# Altium PCB WX0.012.615PCB-4.2.PcbDoc (part 1 of 2)
Units mil, origin at the board's own origin, x right, y up, seen from the top; angles counter-clockwise.
Board outline 3994.73 x 11120.28 mil, 2 copper layers (Top Layer, Bottom Layer), stack 62.249 mil thick; 155 components, 122 nets, 589 pads, 368 vias.
Unrouted connection lines stored in the file: 340.
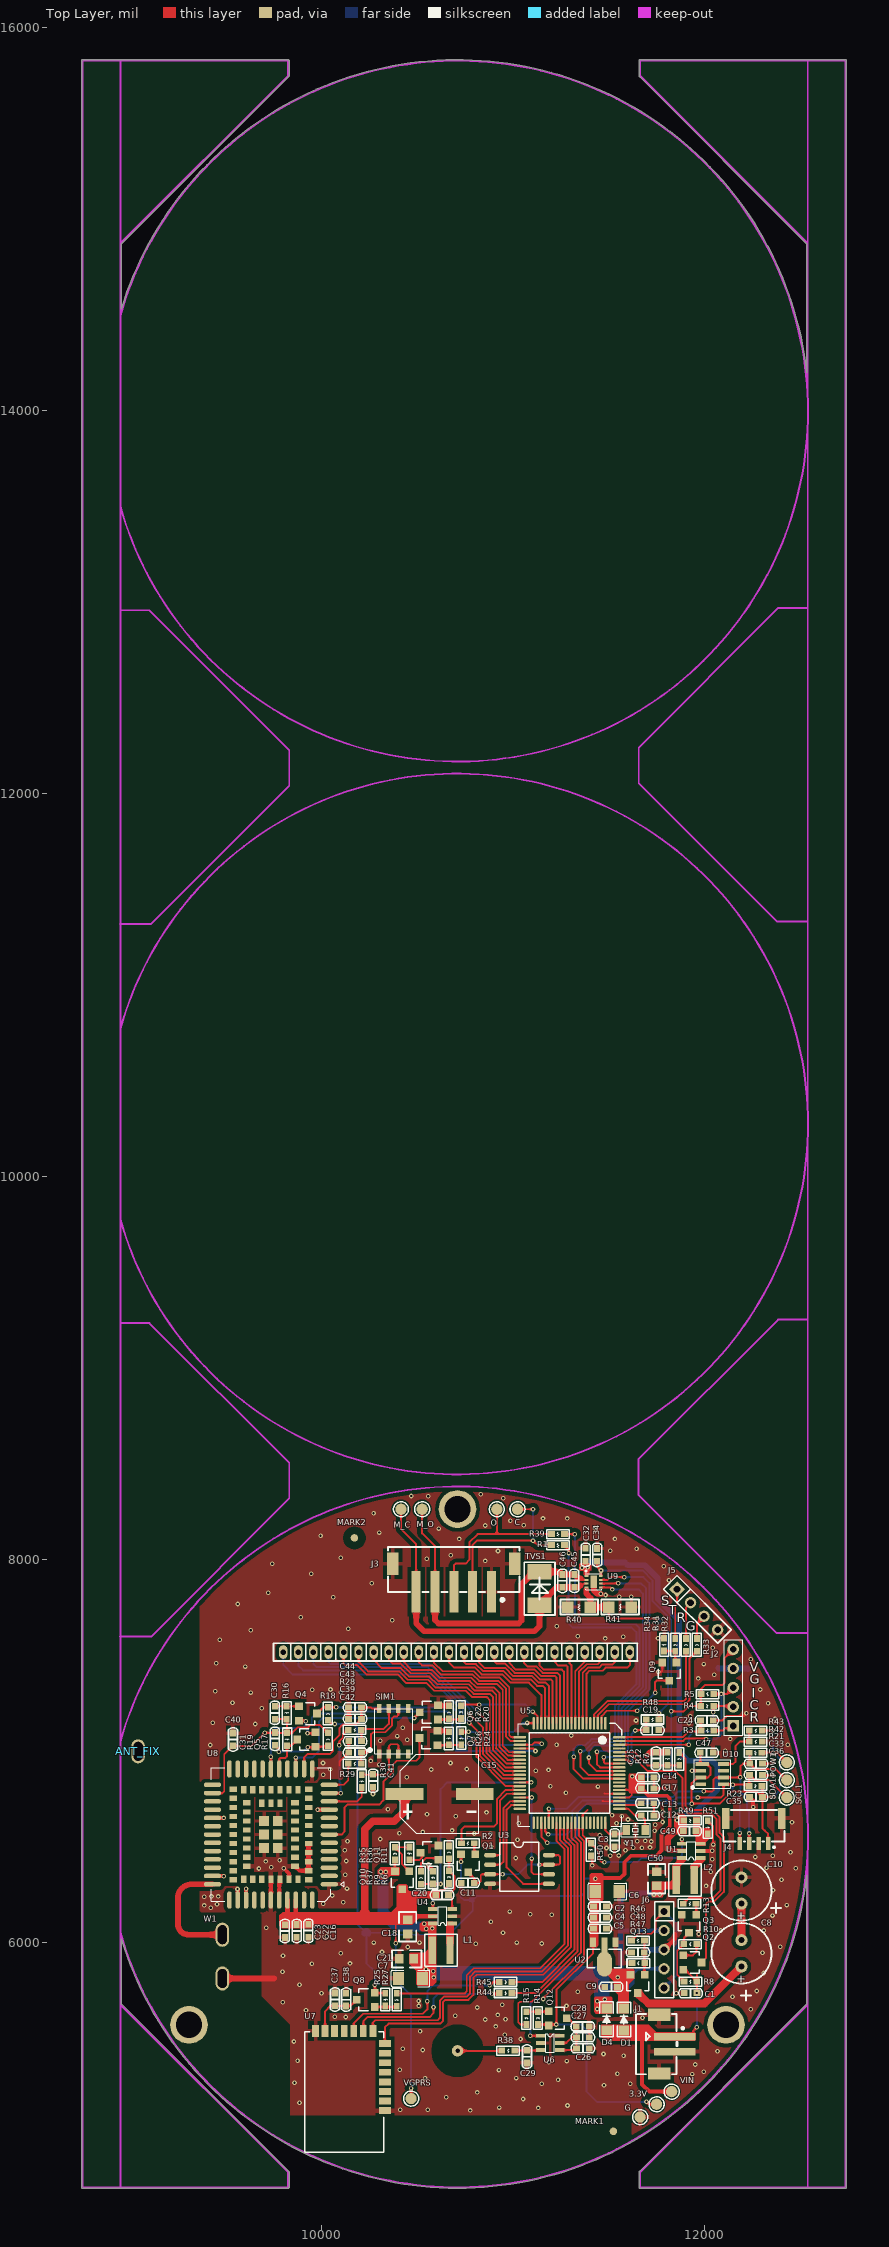
[diagram p0: Top Layer view]
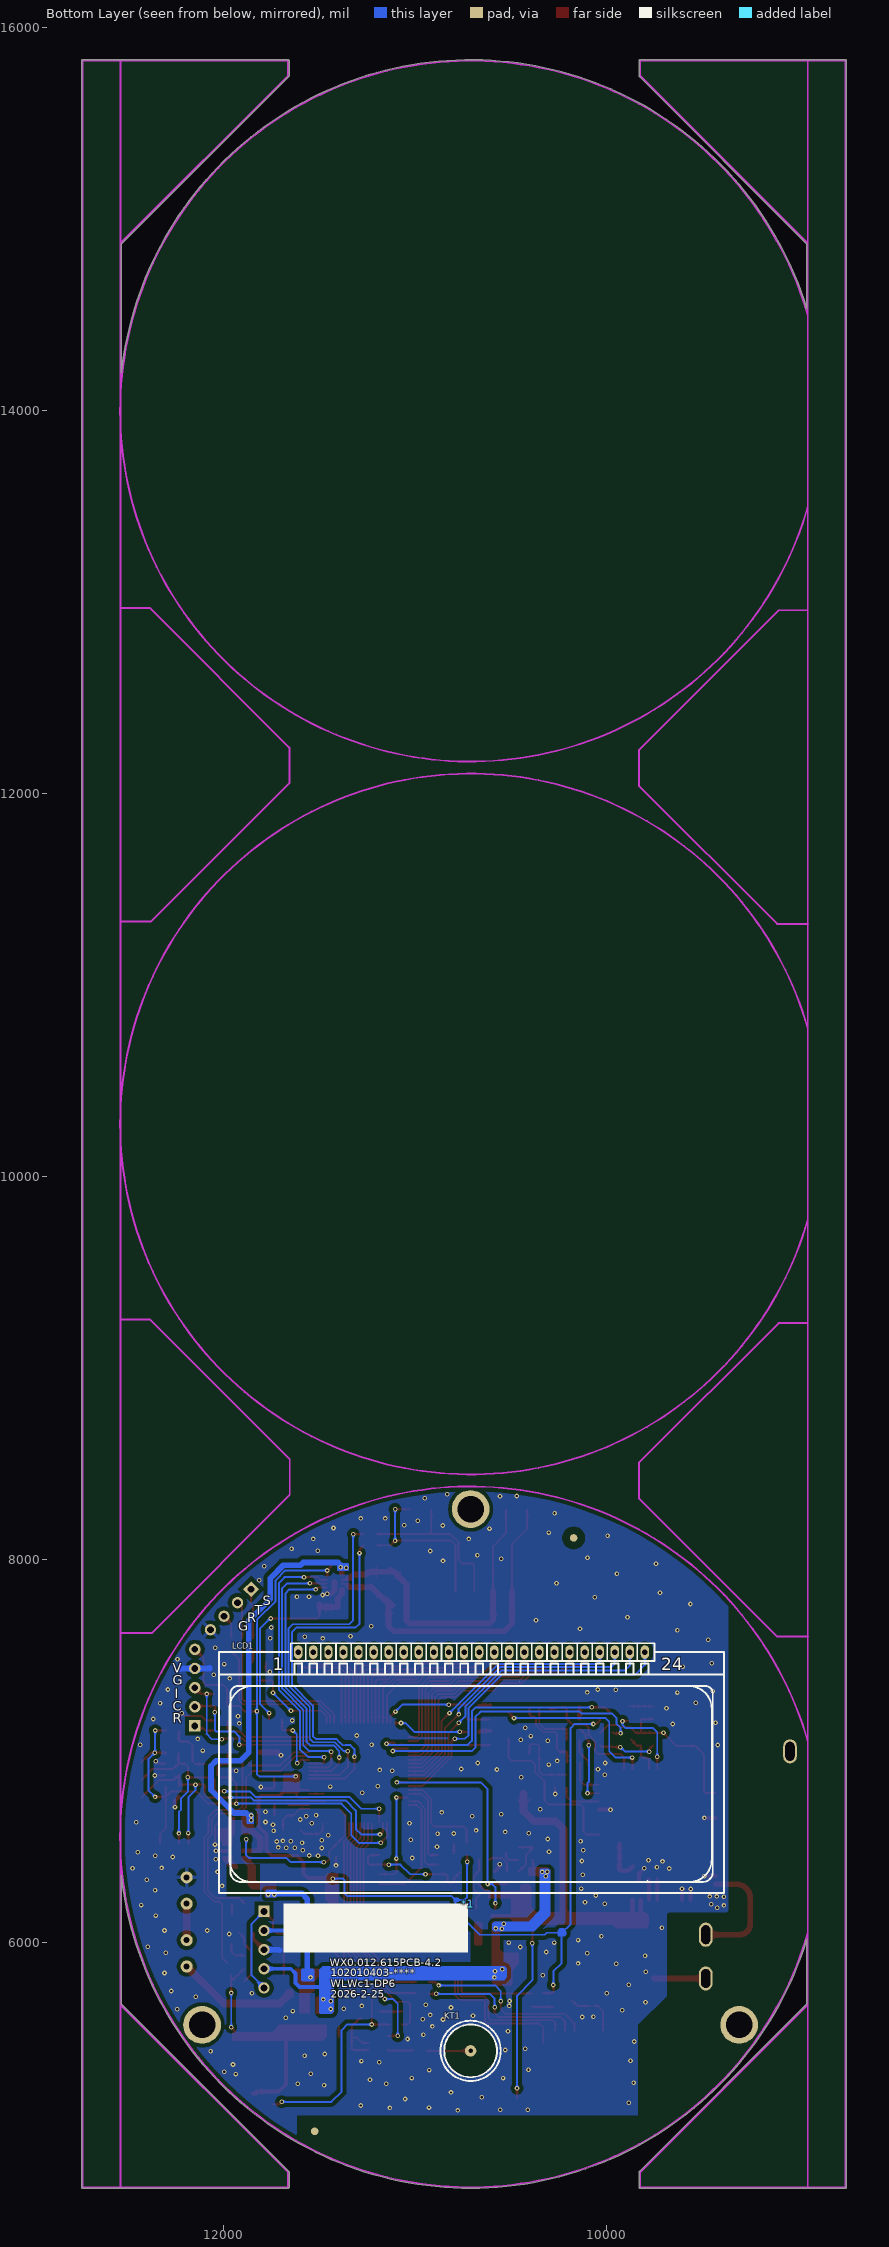
[diagram p1: Bottom Layer view, seen from below]

## Layer stack, top to bottom
Top Solder: solder mask 0.4, Solder Resist, Dk 3.5
Top Layer: signal copper 1.4
Dielectric 1: dielectric 59.4488, FR-4, Dk 4.8
Bottom Layer: signal copper 1.4
Bottom Solder: solder mask 0.4, Solder Resist, Dk 3.5

## Board outline
8748.38,4718.54 ccw(c8753.4,4718.54) 8753.4,4713.52 9826.25,4713.52 ccw(c9826.25,4718.54) 9831.26,4718.54 9831.26,4797.77 ccw(c9826.25,4797.77) 9829.78,4801.33 9829.8,4801.32 8955.26,5675.85 8955.26,6015.14 ccw(c10711.58,6549.23) 11981.25,5223.4 ccw(c11978.59,5227.8) 11982.88,5224.96 ccw(c10711.58,6549.23) 12536.23,6347.96 12536.23,5675.85 11661.7,4801.32 11661.72,4801.33 ccw(c11665.25,4797.77) 11660.23,4797.77 11660.23,4718.54 ccw(c11665.25,4718.54) 11665.25,4713.52 12738.1,4713.52 ccw(c12738.1,4718.54) 12743.11,4718.54 12743.11,15828.77 ccw(c12738.1,15828.77) 12738.1,15833.79 11665.25,15833.79 ccw(c11665.25,15828.77) 11660.23,15828.77 11660.23,15749.54 ccw(c11665.25,15749.54) 11661.72,15745.97 11661.7,15745.99 12536.23,14871.46 12536.23,14199.31 ccw(c10711.58,13998.04) 8955.26,14532.13 8955.26,14871.46 9829.79,15745.99 9829.78,15745.97 ccw(c9826.25,15749.54) 9831.26,15749.54 9831.26,15828.77 ccw(c9826.25,15828.77) 9826.25,15833.79 8753.4,15833.79 ccw(c8753.4,15828.77) 8748.38,15828.77

## Design rules (kind name [scope] priority, off if disabled: settings)
Clearance VIA-PAD-SAME [IsVia vs IsPad] p1: gap=15 ignorepadtopadclearanceinfootprint=FALSE except(0: Arc-Hole Track-Hole SMDPad-Via SMDPad-Hole THPad-Via THPad-Hole Via-Via Via-Hole Fill-Hole Poly-Hole Region-Hole Text-Hole)
Clearance VIA-VIA [ISVIA vs ISVIA] p2: gap=20 ignorepadtopadclearanceinfootprint=FALSE except(0: Arc-Hole Track-Hole SMDPad-Hole THPad-Hole Via-Hole Fill-Hole Poly-Hole Region-Hole Text-Hole)
Clearance VIA-PAD [ISVIA vs ISPAD] p3: gap=15 ignorepadtopadclearanceinfootprint=FALSE except(0: Arc-Hole Track-Hole SMDPad-Hole THPad-Hole Via-Hole Fill-Hole Poly-Hole Region-Hole Text-Hole)
Clearance VIA-TRACK [ISVIA vs ISTRACK] p4: gap=15 ignorepadtopadclearanceinfootprint=FALSE except(0: Arc-Hole Track-Hole SMDPad-Hole THPad-Hole Via-Hole Fill-Hole Poly-Hole Region-Hole Text-Hole)
Clearance Polygon [InPolygon] p5: gap=20 ignorepadtopadclearanceinfootprint=FALSE except(0: Arc-Hole Track-Hole SMDPad-Hole THPad-Hole Via-Hole Fill-Hole Poly-Hole Region-Hole Text-Hole)
Clearance [All] p6: gap=7 ignorepadtopadclearanceinfootprint=FALSE except(0: Arc-Hole Track-Hole SMDPad-Hole THPad-Hole Via-Hole Fill-Hole Poly-Hole Region-Hole Text-Hole)
ComponentClearance [All] p1 off: gap=10 collisioncheckmode=3 verticalgap=10 showdistances=FALSE
FabricationTestPointUsage TestPointUsage [All] p1: valid=0 allowmultiple=FALSE
FabricationTestpoint Testpoint [(IsPad And (OnTopLayer Or OnBottomLayer))] p1: side=3 testpointundercomponent=TRUE minsize=40 maxsize=100 preferedsize=60 minholesize=0 maxholesize=40 preferedholesize=32 testpointgrid=1 allowsidetop=TRUE allowsidebottom=TRUE usegrid=TRUE gridtolerance=0.01
HoleSize [All] p1 off: absolutevalues=TRUE maxlimit=300 minlimit=0 maxpercent=80.000 minpercent=20.000
HoleToHoleClearance [All] p1 off: gap=10 allowstackedmicrovias=TRUE
LayerPairs [All] p1 off: enforce=TRUE
MinimumSolderMaskSliver [All] p1 off: minsoldermaskwidth=10
NetAntennae [All] p1 off: netantennaetolerance=0
PlaneConnect "VIA_Direct Connect" [IsVia] p1: planeconnectstyle=Direct reliefexpansion=20 reliefentries=4 reliefconductorwidth=10 reliefairgap=10
PlaneConnect PIN_HEADER1 [HasFootprint ('PIN254*')] p2: planeconnectstyle=NoConnect reliefexpansion=20 reliefentries=4 reliefconductorwidth=10 reliefairgap=10
PlaneConnect [All] p3: planeconnectstyle=Relief reliefexpansion=20 reliefentries=4 reliefconductorwidth=10 reliefairgap=10
PolygonConnect PIN_HEADER [All vs HasFootprint ('PIN254*')] p1: connectstyle=NoConnect reliefconductorwidth=10 reliefentries=4 polygonreliefangle="90 Angle" airgapwidth=20
PolygonConnect "DIP_Square Button_DPDT" [HasFootprint('KEY')  Or  HasFootprint('KFT DIP-5.8X5.8') vs InNet('GND')] p2: connectstyle=NoConnect reliefconductorwidth=10 reliefentries=4 polygonreliefangle="90 Angle" airgapwidth=20
PolygonConnect SMD_ELECT_CAP [HasFootprint('CAPSM_178_660_780')  Or  HasFootprint('CAPSM_400_1000_1050') Or  HasFootprint('SMD_C 10*10.2') vs Net Like ('*GND*')] p3: connectstyle=Relief reliefconductorwidth=40 reliefentries=4 polygonreliefangle="90 Angle" airgapwidth=20
PolygonConnect [isvia] p4: connectstyle=Direct reliefconductorwidth=15 reliefentries=4 polygonreliefangle="90 Angle" airgapwidth=10
PolygonConnect PolygonConnect_1 [All] p5: connectstyle=Relief reliefconductorwidth=20 reliefentries=4 polygonreliefangle="90 Angle" airgapwidth=20
RoutingVias [All] p1: holewidth=10 width=20 viastyle="Through Hole" minholewidth=5 minwidth=5 maxholewidth=50 maxwidth=100
SilkToBoardRegionClearance [All] p1 off:
SilkToSilkClearance [All] p1 off: silktosilkclearance=10
SilkToSolderMaskClearance [IsPad] p1 off: minsilkscreentomaskgap=10 clearancetoexposedcopper=TRUE
SolderMaskExpansion [All] p1: expansion=4
Width [All] p1: maxlimit=300 minlimit=8 preferedwidth=8
18 further rules are at their usual default settings.

## Components (designator, comment, footprint, x,y, rotation, side; value= is the part's Value field where it differs from the comment)
3.3V "TEST-PAD" TEST-PAD 11751.49,5152.25 r90 top
*1 "Bar Code1" "Bar Code1" 10724,6201 r0 bottom locked
ANT_FIX "天线固定脚" ANT-fix 9043,6996 r90 top
C "TEST-PAD" TEST-PAD 11025,8261 r90 top
C1 "33pF/50V" CAP0603 11896.49,5733 r0 top
C2 "22pF/50V" CAP0603 11423,6186 r0 top
C3 "12pF/50V" CAP0603 11532,6498 r90 top
C4 "10uF/10V" CAP0603 11423,6128 r0 top
C5 "100nF/50V" CAP0603 11423,6070 r0 top
C6 "100uF/6.3V" GRM1206 11494.29,6264 r270 top
C7 "100uF/6.3V" GRM1206 10466.3,5810 r90 top
C8 "1F/2.75V" CAPPC_350_800_1600 12195,5872 r90 top
C9 "100nF/50V" CAP0603 11547,5765 r180 top
C10 "1F/2.75V" CAPPC_350_800_1600 12195,6200 r90 top
C11 "100nF/50V" CAP0603 10798,6309 r180 top
C12 "12pF/50V" CAP0603 11737.51,6660 r180 top
C13 "100nF/50V" CAP0603 11736.51,6725 r180 top
C14 "100nF/50V" CAP0603 11737.51,6860 r180 top
C15 "1000uF/10V" CAPSM_400_1000_1050 10618,6774 r0 top
C16 "33pF/50V" CAP0603 9933,6091.51 r270 top
C17 "100nF/50V" CAP0603 11737.51,6803 r180 top
C18 "22uF/10V" CAP0805 10451,6116.8 r180 top
C19 "1nF/50V" CAP0603 11697,7107 r0 top
C20 "22pF/50V" CAP0603 10598,6246 r0 top
C21 "22uF/10V" CAP0805 10483,5912 r90 top
C22 "100nF/50V" CAP0603 9871,6024.86 r90 top
C23 "10pF/50V" CAP0603 9810,6090.36 r270 top
C24 "33pF/50V" CAP0603 12047.37,7158 r180 top
C25 "10pF/50V" CAP0603 11749,6990.51 r270 top
C26 "1uF/16V" CAP0603 11399.51,5444 r180 top
C27 "100pF/50V" CAP0603 11334,5502 r0 top
C28 "100nF/50V" CAP0603 11333,5559 r0 top
C29 "5pF/50V" CAP0603 11074,5368.49 r90 top
C30 "1nF/50V" CAP0603 9757,7165 r90 top
C31 "1nF/50V" CAP0603 9758,7094.51 r270 top
C32 "100nF/50V" CAP0603 11381,7990 r90 top
C33 "33pF/50V" CAP0603 12238.49,6932 r0 top
C34 "100nF/50V" CAP0603 11441,8055.51 r270 top
C35 "100nF/50V" CAP0603 12304,6758 r180 top
C36 "33pF/50V" CAP0603 12304,6873.33 r180 top
C37 "10uF/10V" CAP0603 10071,5667 r90 top
C38 "1uF/16V" CAP0603 10130,5666.49 r90 top
C39 "33pF/50V" CAP0603 10143.49,7049.43 r0 top
C40 "1uF/16V" CAP0603 9538,7025.49 r90 top
C41 "33pF/50V" CAP0603 10270,6809.49 r90 top
C42 "33pF/50V" CAP0603 10143.49,6990.57 r0 top
C43 "100nF/50V" CAP0603 10209,7166.14 r180 top
C44 "33pF/50V" CAP0603 10209,7225 r180 top
C45 "100nF/50V" CAP0603 11322,7920 r270 top
C46 "33pF/50V" CAP0603 11260,7919.51 r270 top
C47 "100nF/50V" CAP0603 11980.51,6989 r0 top
C48 "100nF/50V" CAP0603 11687,5946 r180 top
C49 "22pF/50V" CAP0603 11891.49,6580 r0 top
C50 "22uF/10V" CAP0805 11752,6293 r0 top
D1 "DS36W" SOD-123FL 11581,5535.09 r90 top
D4 "DS36W" SOD-123FL 11491,5536.09 r90 top
G "TEST-PAD" TEST-PAD 11665.49,5085.25 r90 top
J1 "S_PH200_1*2R" CONN-SMD_2.0-2PLT 11805.35,5466.46 r90 top
J2 "Header 5" PIN254_1*5SR 12152,7129 r90 top
J3 "XH2.54-5" CONN-SMD_5P-P2.50_ZX-XH2.54-5PLT 10692.43,7902.82 r180 top
J4 "GH1.25-4PIN" CONN-SMD_4P-P1.25_XUNPU_WAFER-GH1.25-4PLB 12260,6580 r180 top
J5 "XH254_4P" HDR1X4_2.54 11858.58,7843.42 r315 top
J6 "PIN254_1*5*WXHJ" PIN254_1*5*1100S 11791,6160 r270 top
KT1 "Touch" TOUCH-0.3-7-8 10711.57,5431.34 r180 bottom
L1 "4.7uH" IND4020 10625.35,5957 r90 top
L2 "4.7uH" IND4020 11901,6324 r90 top
LCD1 "LCD" GVH31158A-HPP-WG 10706.51,7515 r180 bottom locked
M_C "TEST-PAD" TEST-PAD 10416,8261 r90 top
M_O "TEST-PAD" TEST-PAD 10527,8261 r90 top
MARK1 "MARK" MARK 11526,5011 r90 top
MARK2 "MARK" MARK 10173,8111 r90 top
O "TEST-PAD" TEST-PAD 10917,8261 r90 top
POW1 "TEST-PAD" TEST-PAD 12432,6938 r90 top
Q1 "PNPS-9012" SOT-23 10767,6411 r180 top
Q2 "PNPS-9012" SOT-23 11939,5893 r270 top
Q3 "NPNS-9013" SOT-23 11921,6095 r180 top
Q4 "NPNS-9013" SOT-23 9930.24,7193.4 r270 top
Q5 "NPNS-9013" SOT-23 9922,7058 r90 top
Q6 "NPNS-9013" SOT-23 10562,7200 r90 top
Q7 "NPNS-9013" SOT-23 10560,7066 r90 top
Q8 "UT3401ZG" SOT-23 10232.24,5698.13 r90 top
Q9 "NPNS-9013" SOT-23 11818.4,7412.76 r180 top
Q10 "UT3401ZG" SOT-23 10422,6322 r180 top
Q11 "NPNS-9013" SOT-23 10565,6467 r90 top
Q12 "UT3401ZG" SOT-23 11235,5601 r270 top
Q13 "UT3401ZG" SOT-23 11653,5781 r180 top
R1 "1K 5%" RES0603 11270,8073 r180 top
R2 "3K 5%" RES0603 10732,6516 r0 top
R3 "100R 5%" RES0603 11984,7104 r0 top
R4 "10K 5%" RES0603 12050,7233 r180 top
R5 "10K 5%" RES0603 11984,7296 r0 top
R6 "240K 1%" RES0603 10667,6373 r270 top
R7 "330K 5%" RES0603 11870,6990 r270 top
R8 "10K 5%" RES0603 11895,5794 r0 top
R9 "1M 5%" RES0603 10584,6370 r270 top
R10 "10K 5%" RES0603 11894,5989 r0 top
R11 "100K 5%" RES0603 10667,6502 r270 top
R12 "220K 5%" RES0603 11809,6924 r90 top
R13 "3K 5%" RES0603 11891,6200 r0 top
R14 "2M 5%" RES0603 11132,5636 r270 top
R15 "200K 5%" RES0603 11071,5636 r270 top
R16 "4.7K 5%" RES0603 9819,7164 r90 top
R17 "4.7K 5%" RES0603 10034,7093 r270 top
R18 "4.7K 5%" RES0603 10035,7226 r270 top
R19 "4.7K 5%" RES0603 9821,7026 r90 top
R20 "3K 5%" RES0603 10730,7235 r270 top
R21 "4.7K 5%" RES0603 12301.86,6988.67 r180 top
R22 "1K 5%" RES0603 10667,7234 r270 top
R23 "4.7K 5%" RES0603 12301.86,6815.67 r180 top
R24 "3K 5%" RES0603 10731,7098 r270 top
R25 "2M 5%" RES0603 10334,5666 r90 top
R26 "1K 5%" RES0603 10666,7031 r90 top
R27 "200K 5%" RES0603 10394,5732 r270 top
R28 "22R 5%" RES0603 10140.86,7108.29 r0 top
R29 "22R 5%" RES0603 10140.86,6931.71 r0 top
R30 "22R 5%" RES0603 10211.14,6806.86 r90 top
R31 "3K 5%" RES0603 11849,7586 r270 top
R32 "1K 5%" RES0603 11905.5,7586 r270 top
R33 "1K 5%" RES0603 11962,7586 r270 top
R34 "1K 5%" RES0603 11790,7520 r90 top
R35 "2M 5%" RES0603 10385,6495 r270 top
R36 "200K 5%" RES0603 10460,6429 r90 top
R37 "3K 5%" RES0603 10521,6369 r270 top
R38 "1K 5%" RES0603 10943,5433 r0 top
R39 "1K 5%" RES0603 11270,8131 r180 top
R40 "1R 5%" RES1206 11288,7750 r0 top
R41 "1R 5%" RES1206 11620.11,7750 r180 top
R42 "10K 5%" RES0603 12235.86,7047.33 r0 top
R43 "10K 5%" RES0603 12235.86,7105 r0 top
R44 "0R 5%" RES0603 10996,5733 r180 top
R45 "0R 5%" RES0603 10996,5791 r180 top
R46 "10R 5%" RES0603 11621,6007 r0 top
R47 "1M 5%" RES0603 11623,5890 r0 top
R48 "22R 5%" RES0603 11697,7163 r0 top
R49 "1M 1%" RES0603 11960,6635 r180 top
R50 "1M 5%" RES0603 11408,6449 r90 top
R51 "300K 1%" RES0603 12019,6633 r270 top
SCL1 "TEST-PAD" TEST-PAD 12432,6754.5 r90 top
SDA1 "TEST-PAD" TEST-PAD 12432,6846.25 r90 top
SIM1 "SIM  IC" SIMIC 10476.43,7219.22 r180 top
TVS1 "SMBJ6.0CA" DO-214AA 11140,7754 r90 top
U1 "SN-SY7072A" SOT-23-6 11982,6438.6 r180 top
U2 "CE6232A33P" SOT-89 11479,5962.74 r180 top
U3 "P25Q80H-SUH-IR" SOP-8L-200MIL 10882,6454 r0 top
U4 "SN-SY7072A" SOT-23-6 10683,6097 r180 top
U5 "FM33LG048" LQFP80 11297,6883 r270 top locked
U6 "VKD223L" SOT-23-6 11146,5509.8 r0 top
U7 "DB809" DB809 10332,5469 r180 top
U8 "EC801E" EC801E 9736.54,6561.52 r180 top
U9 "DRV8837DSGR" S-PWSON-N8 11423,7882 r0 top
U10 "07_HP303B" HP303B 12042,6877 r0 top
VGPRS "TEST-PAD" TEST-PAD 10469,5182 r90 top
VIN "TEST-PAD" TEST-PAD 11830.49,5218.25 r90 top
W1 "天线" ANT-tanpian 9483,6038 r270 top
Y1 "SF32WK32768D71T005" SMD-3215_2P 11691.43,6585 r180 top

## Footprints (in the part's own frame and the unit in brackets; to place one, negate y for a bottom-side part, rotate by r counter-clockwise, add the part's x,y. Pads: shape width x height; smd on the part's side, far side on the other; paste and mask are expansions set on the pad)
ANT-fix [mm]
  oval 3.2x1.8 hole 1.2 slot 2.5 at 0 deg: 1(0,0)
ANT-tanpian [mm]
  oval 3.2x1.8 hole 1.2 slot 2.5 at 0 deg: 1(0,0) 2(5.8,0)
"Bar Code1" [mil]
  silkscreen extent 0,0 965,256
CAP0603 [mil]
  rect 35x31 smd: 1(-0.49,0) 2(66.51,0)
  silkscreen extent -29,-24 94,23, body extent 1,-15 72,15, height 20
CAP0805 [mm]
  rect 1.27x1.14 smd: 1(0,0) 2(0,1.9)
  silkscreen extent -1.14,-1.02 1.14,2.92, body extent -0.65,-0.11 0.65,1.89, height 1.25
CAPPC_350_800_1600 [mm]
  round 1.6 hole 0.8: 1(0,0) 2(3.5,0)
  silkscreen extent -2.25,-4 5.75,4, body extent -2.26,-4 5.75,4, height 15.11
CAPSM_400_1000_1050 [mm]
  rect 5x1.6 smd: 1(-4.65,0) 2(4.65,0)
  silkscreen extent -5.23,-5.23 5.23,5.23, body extent -5.8,-5.15 5.8,5.15, height 10
CONN-SMD_2.0-2PLT [mm]
  rect 1x5.5 smd: 1(1,-1.025) 2(-1,-1.025)
  rect 1.6x3 smd: 3(3.9,1.025) 4(-3.9,1.025)
  silkscreen extent -4,-2.25 4,4.1, body extent -4.02,-3.37 3.98,4.13, height 6.15
CONN-SMD_4P-P1.25_XUNPU_WAFER-GH1.25-4PLB [mm]
  rect 0.6x1.7 smd paste+0.051: 1(-1.875,1.675) 2(-0.625,1.675) 3(0.625,1.675) 4(1.875,1.675)
  rect 1x2.8 smd paste+0.051: 5(-3.725,-1.675) 6(3.725,-1.675)
  silkscreen extent -4.06,-2.79 4.06,2.29, body extent -4.13,-2.86 4.13,2.09, height 4.17
CONN-SMD_5P-P2.50_ZX-XH2.54-5PLT [mm]
  rect 1.2x5.5 smd paste+0.051: 1(-5,1.875) 2(-2.5,1.875) 3(0,1.875) 4(2.5,1.875) 5(5,1.875)
  rect 1.5x3 smd paste+0.051: 6(8.1,-1.875) 7(-8.1,-1.875)
  silkscreen extent -8.72,-4.06 8.76,3.12, body extent -8.75,-4.05 8.75,4.25, height 7.8
DB809 [mm]
  rect 1.6x0.9 smd: 1(0,8.89) 2(0,7.62) 3(0,6.35) 4(0,5.08) 5(0,3.81) 6(0,2.54) 7(0,1.27) 8(0,0)
  rect 0.9x1.6 smd: 9(1.59,-1.7) 10(2.86,-1.7) 11(4.13,-1.7) 12(5.4,-1.7) 13(6.67,-1.7) 14(7.94,-1.7) 15(9.21,-1.7)
  silkscreen extent 0.15,-1.6 10.65,14.4
DO-214AA [mil]
  rect 80x125 smd: 1(5,0) 2(180,0)
  silkscreen extent -45,-80 230,80, body extent -13,-77 203,77, height 96
EC801E [mm] "EC801E Moudle 109PIN 17.7X15.8mm H2.4mm RO"
  oval 2.3x0.6 smd mask+0.05: 1(-7.75,6.6) 2(-7.75,5.5) 3(-7.75,4.4) 4(-7.75,3.3) 5(-7.75,2.2) 6(-7.75,1.1) 7(-7.75,0) 8(-7.75,-1.1) 9(-7.75,-2.2) 10(-7.75,-3.3) 11(-7.75,-4.4) 12(-7.75,-5.5) 13(-7.75,-6.6) 23(7.75,-6.6) 24(7.75,-5.5) 25(7.75,-4.4) 26(7.75,-3.3) 27(7.75,-2.2) 28(7.75,-1.1) 29(7.75,0) 30(7.75,1.1) 31(7.75,2.2) 32(7.75,3.3) 33(7.75,4.4) 34(7.75,5.5) 35(7.75,6.6)
  oval 0.6x2.3 smd mask+0.05: 14(-4.4,-8.7) 15(-3.3,-8.7) 16(-2.2,-8.7) 17(-1.1,-8.7) 18(0,-8.7) 19(1.1,-8.7) 20(2.2,-8.7) 21(3.3,-8.7) 22(4.4,-8.7) 36(4.4,8.7) 37(3.3,8.7) 38(2.2,8.7) 39(1.1,8.7) 40(0,8.7) 41(-1.1,8.7) 42(-2.2,8.7) 43(-3.3,8.7) 44(-4.4,8.7) 95(-5.5,-8.7) 96(5.5,-8.7) 97(5.5,8.7) 98(-5.5,8.7)
  rect 1x0.7 smd mask+0.05: 45(-5,4.8) 46(-5,3.6) 47(-5,2.4) 48(-5,1.2) 49(-5,0) 50(-5,-1.2) 51(-5,-2.4) 52(-5,-3.6) 53(-5,-4.8) 59(5,-4.8) 60(5,-3.6) 61(5,-2.4) 62(5,-1.2) 63(5,0) 64(5,1.2) 65(5,2.4) 66(5,3.6) 67(5,4.8) 73(-3.2,4.2) 74(-3.2,3) 75(-3.2,1.8) 76(-3.2,0.6) 77(-3.2,-0.6) 78(-3.2,-1.8) 79(-3.2,-3) 80(-3.2,-4.2) 81(3.2,-4.2) 82(3.2,-3) 83(3.2,-1.8) 84(3.2,-0.6) 85(3.2,0.6) 86(3.2,1.8) 87(3.2,3) 88(3.2,4.2) 99(-5,6) 100(-5,-6) 103(5,-6) 104(5,6)
  rect 0.7x1 smd mask+0.05: 54(-2.4,-5.95) 55(-1.2,-5.95) 56(0,-5.95) 57(1.2,-5.95) 58(2.4,-5.95) 68(2.4,5.95) 69(1.2,5.95) 70(0,5.95) 71(-1.2,5.95) 72(-2.4,5.95) 101(-3.6,-5.95) 102(3.6,-5.95) 105(3.6,5.95) 106(-3.6,5.95) 107(-1.2,-4.15) 108(0,-4.15) 109(1.2,-4.15)
  rect 1.3x1.3 smd mask+0.05: 89(-0.9,1.8) 90(-0.9,0) 91(-0.9,-1.8) 92(0.9,-1.8) 93(0.9,0) 94(0.9,1.8)
  silkscreen extent -9.65,-8.85 7.9,8.85, body extent -7.9,-8.85 7.9,8.85, height 2.4
GRM1206 [mm]
  rect 1.728x1.485 smd: 1(0,-1.593) 2(0,1.593)
  silkscreen extent -1.09,-2.56 1.09,2.56, body extent -0.8,-1.64 0.8,1.64, height 1.6
GVH31158A-HPP-WG [mm]
  oval 1.1x1.8 hole 0.732: 1(-23,0) 2(-21,0) 3(-19,0) 4(-17,0) 5(-15,0) 6(-13,0) 7(-11,0) 8(-9,0) 9(-7,0) 10(-5,0) 11(-3,0) 12(-1,0) 13(1,0) 14(3,0) 15(5,0) 16(7,0) 17(9,0) 18(11,0) 19(13,0) 20(15,0) 21(17,0) 22(19,0) 23(21,0) 24(23,0)
  silkscreen extent -33.5,-32 33.5,1.17, body extent -33.53,-32 33.53,0, height 3
HDR1X4_2.54 [mm] "Connector; Header; 4 Position"
  rect 1.5x1.5 hole 0.9: 1(0,0)
  round 1.5 hole 0.9: 2(2.54,0) 3(5.08,0) 4(7.62,0)
  silkscreen extent -1.27,-1.27 8.89,1.27, body extent -1.3,-1.3 8.86,1.24, height 8.54
HP303B [mm]
  rect 1.8x0.5 smd: 1(-1.3,1.35)
  rect 1.4x0.5 smd: 2(-1.5,0.45) 3(-1.5,-0.45) 4(-1.5,-1.35) 5(1.5,-1.35) 6(1.5,-0.45) 7(1.5,0.45) 8(1.5,1.35)
  silkscreen extent -2.74,-1.92 2.39,1.9, body extent -1.8,-1.9 1.8,1.9, height 1.17
IND4020 [mm]
  rect 3.7x0.98 smd: 1(0,1.185) 2(0,-1.185)
  silkscreen extent -2.15,-2.15 2.15,2.15, body extent -2.05,-2.05 2.05,2.05, height 2.1
LQFP80 [mm]
  oval 1.7x0.3 smd: 1(-6.6,4.75) 2(-6.6,4.25) 3(-6.6,3.75) 4(-6.6,3.25) 5(-6.6,2.75) 6(-6.6,2.25) 7(-6.6,1.75) 8(-6.6,1.25) 9(-6.6,0.75) 10(-6.6,0.25) 11(-6.6,-0.25) 12(-6.6,-0.75) 13(-6.6,-1.25) 14(-6.6,-1.75) 15(-6.6,-2.25) 16(-6.6,-2.75) 17(-6.6,-3.25) 18(-6.6,-3.75) 19(-6.6,-4.25) 20(-6.6,-4.75) 41(6.6,-4.75) 42(6.6,-4.25) 43(6.6,-3.75) 44(6.6,-3.25) 45(6.6,-2.75) 46(6.6,-2.25) 47(6.6,-1.75) 48(6.6,-1.25) 49(6.6,-0.75) 50(6.6,-0.25) 51(6.6,0.25) 52(6.6,0.75) 53(6.6,1.25) 54(6.6,1.75) 55(6.6,2.25) 56(6.6,2.75) 57(6.6,3.25) 58(6.6,3.75) 59(6.6,4.25) 60(6.6,4.75)
  oval 0.3x1.7 smd: 21(-4.75,-6.6) 22(-4.25,-6.6) 23(-3.75,-6.6) 24(-3.25,-6.6) 25(-2.75,-6.6) 26(-2.25,-6.6) 27(-1.75,-6.6) 28(-1.25,-6.6) 29(-0.75,-6.6) 30(-0.25,-6.6) 31(0.25,-6.6) 32(0.75,-6.6) 33(1.25,-6.6) 34(1.75,-6.6) 35(2.25,-6.6) 36(2.75,-6.6) 37(3.25,-6.6) 38(3.75,-6.6) 39(4.25,-6.6) 40(4.75,-6.6) 61(4.75,6.6) 62(4.25,6.6) 63(3.75,6.6) 64(3.25,6.6) 65(2.75,6.6) 66(2.25,6.6) 67(1.75,6.6) 68(1.25,6.6) 69(0.75,6.6) 70(0.25,6.6) 71(-0.25,6.6) 72(-0.75,6.6) 73(-1.25,6.6) 74(-1.75,6.6) 75(-2.25,6.6) 76(-2.75,6.6) 77(-3.25,6.6) 78(-3.75,6.6) 79(-4.25,6.6) 80(-4.75,6.6)
  silkscreen extent -6.62,-6.81 7.1,6.91, body extent -5.33,-5.33 5.36,5.33, height 2
MARK [mm]
  round 1 smd: 0(0,0)
  round 1 smd far side: 1(0,0)
  Top Layer pour cut-out: -1.5,0 -1.386,-0.574 -1.061,-1.061 -0.574,-1.386 0,-1.5 0,-1.5 0.574,-1.386 1.061,-1.061 1.386,-0.574 1.5,0 1.5,0 1.386,0.574 1.061,1.061 0.574,1.386 0,1.5 0,1.5 -0.574,1.386 -1.061,1.061 -1.386,0.574 -1.5,0
  Bottom Layer pour cut-out: -1.5,0 -1.386,-0.574 -1.061,-1.061 -0.574,-1.386 0,-1.5 0,-1.5 0.574,-1.386 1.061,-1.061 1.386,-0.574 1.5,0 1.5,0 1.386,0.574 1.061,1.061 0.574,1.386 0,1.5 0,1.5 -0.574,1.386 -1.061,1.061 -1.386,0.574 -1.5,0
PIN254_1*5*1100S [mm]
  rect 1.5x1.5 hole 0.9: 1(0,0)
  round 1.5 hole 0.9: 2(2.54,0) 3(5.08,0) 4(7.62,0) 5(10.16,0)
  silkscreen extent -1.27,-1.27 11.43,1.27
PIN254_1*5SR [mil]
  rect 60x60 hole 35: 1(0,0)
  round 60 hole 35: 2(100,0) 3(200,0) 4(300,0) 5(400,0)
  silkscreen extent -50,-50 450,50
RES0603 [mil]
  rect 35x31 smd: 1(0,0) 2(67,0)
  silkscreen extent -26,-24 92,23, body extent 0,-15 71,15, height 12
RES1206 [mil]
  rect 60x60 smd: 1(0,0) 2(118.11,0)
  silkscreen extent -39,-39 157,39, body extent -28,-29 150,29, height 20
S-PWSON-N8 [mm]
  rect 0.5x0.28 smd: 1(-0.95,0.75) 2(-0.95,0.25) 3(-0.95,-0.25) 4(-0.95,-0.75) 5(0.95,-0.75) 6(0.95,-0.25) 7(0.95,0.25) 8(0.95,0.75)
  rect 0.9x1.6 smd: 9(0,0)
  silkscreen extent -1.09,-1.05 1.04,1.52, body extent -1.01,-1.01 1.01,0.99, height 0.81
SIMIC [mm]
  rect 0.6x1.2 smd: 1(4.405,6) 2(3.135,6) 3(1.865,6) 4(0.595,6) 5(0.595,0) 6(1.865,0) 7(3.135,0) 8(4.405,0)
  silkscreen extent 0,0 5.73,6, body extent 0,0 4.95,5.97, height 0.6
SMD-3215_2P [mm]
  rect 1x1.3 smd: 1(0,0) 2(2.5,0)
  silkscreen extent -0.69,-0.91 3.19,0.91, body extent -0.3,-0.99 2.9,0.99, height 0.7
SOD-123FL [mm]
  rect 1.3x1.4 smd: 1(0.074,0) 2(2.974,0)
  silkscreen extent -0.78,-0.9 3.82,0.9, body extent -0.28,-0.82 3.32,0.82, height 0.95
SOP-8L-200MIL [mm]
  oval 1.6x0.61 smd: 1(0,0) 2(0,-1.27) 3(0,-2.54) 4(0,-3.81) 5(7.8,-3.81) 6(7.8,-2.54) 7(7.8,-1.27) 8(7.8,0)
  silkscreen extent 1.27,-4.83 6.48,1.68, body extent 0.89,-4.35 6.89,0.55, height 1.7
SOT-23 [mil]
  rect 40x40 smd: 1(-37.4,-47.24) 2(37.4,-47.24) 3(0,47.24)
  silkscreen extent -57,-12 57,35, body extent -57,-55 57,55, height 47
SOT-23-6 [mil]
  rect 50x20 smd: 1(0,0) 2(0,-37.4) 3(0,-74.8) 4(100,-74.8) 5(100,-37.4) 6(100,0)
  silkscreen extent 27,-86 72,10, body extent -7,-94 103,20, height 57
SOT-89 [mm]
  rect 0.8x1.27 smd: 1(-1.5,-0.9) 3(1.5,-0.9)
  rect 0.8x2.54 smd: 2(0,-0.265)
  oval 2x3.3 smd: 2(0,2)
  silkscreen extent -2.25,0 2.25,2.5, body extent -2.25,-1.02 2.25,2.92, height 1.4
TEST-PAD [mm]
  round 1.5 smd: 1(0,0)
  silkscreen extent -1,-1 1,1
TOUCH-0.3-7-8 [mil]
  round 60 hole 23.62: 1(0,0)
  Multi-Layer pour cut-out: 0,-137.8 -52.73,-127.31 -97.44,-97.44 -127.31,-52.73 -137.8,0 -137.8,0 -127.31,52.73 -97.44,97.44 -52.73,127.31 0,137.8 0,137.8 52.73,127.31 97.44,97.44 127.31,52.73 137.8,0 137.8,0 127.31,-52.73 97.44,-97.44 52.73,-127.31 0,-137.8
  silkscreen extent -138,-138 138,138, body extent -138,-138 138,138, height 315

## Part data
3.3V C G M_C M_O O POW1 SCL1 SDA1 VGPRS VIN: library part AD_WXHJ_TEST-PAD_01, "单面焊盘测试点", Part Name=测试点, ID=23, Part Number=AD_WXHJ_TEST-PAD_01, SMD/DIP=SMD
*1: library part "AD_WXHJ_Bar Code_02", "条形码 ,填充，无需焊接器件", Part Name=条形码, ID=17, Part Number="AD_WXHJ_Bar Code_02", SMD/DIP=SMD
ANT_FIX: library part AD_WXHJ_TEST-POINT_01, ID=24, Part Name=天线固定脚, Part Number=AD_WXHJ_TEST-POINT_01, SMD/DIP=SMD
C1 C16 C24 C33 C36 C39 C41 C42 C44 C46: library part 101020103-0027, "33pF,50 V,±10%,0603,国巨,CC0603KRNPO9BN33", Part Name=0603贴片电容, ID=17, Part Number=101020103-0027, SMD/DIP=SMD
C2 C20 C49: library part 101020103-0009, "22pF,50 V,±5%,0603,国巨,CC0603JRNPO9BN22", Part Name=0603贴片电容, ID=16, Part Number=101020103-0009, SMD/DIP=SMD
C3 C12: library part 101020103-0005, "12P,50 V,±5%,0603,国巨,CC0603JRNPO9BN12", Part Name=0603贴片电容, ID=11, Part Number=101020103-0005, SMD/DIP=SMD
C4 C37: library part 101020103-0026, "106pF,10 V,±10%,0603,村田,GRM188R61A106KE47D", Part Name=0603贴片电容, ID=8, Part Number=101020103-0026, SMD/DIP=SMD
C5 C9 C11 C13 C14 C17 C22 C28 C32 C34 C35 C43 C45 C47 C48: library part 101020103-0021, "104pF,50 V,±10%,0603,国巨,CC0603KRX7R9BB104", Part Name=0603贴片电容, ID=3, Part Number=101020103-0021, SMD/DIP=SMD
C6 C7: library part 101020101-0020, "100uF,6.3 V,±20%,1206,村田,GRM31CR60J107ME39L", Part Name=贴片电容, ID=27, Part Number=101020101-0020, SMD/DIP=SMD
C8 C10: library part 1010202-0015, "1F,2.75 V,-20%~+20%,8mm*16mm,红宝石,2.7 DMC 1 M MY4 8X16", Part Name=法拉电容, ID=12, Part Number=1010202-0015, SMD/DIP=DIP
C15: library part 1010203-0033, "1000UF,10 V,±20%,10*10.5mm,广东风华高新技术股份有限公司,8102LBM010MT0001T", Part Name=贴片电解电容, ID=24, Part Number=1010203-0033, SMD/DIP=SMD
C18 C21 C50: library part 101020102-0012, "226P,10 V,±20%,0805,村田电子有限公司,GRM21BR61A226ME51L", Part Name=贴片电容, ID=20, Part Number=101020102-0012, SMD/DIP=SMD
C19 C30 C31: library part 101020103-0022, "102pF,50 V,±10%,0603,国巨,CC0603KRX7R9BB102", Part Name=0603贴片电容, ID=13, Part Number=101020103-0022, SMD/DIP=SMD
C23 C25: library part 101020103-0014, "10pF,50 V,±5%,0603,X7R,国巨,CC0603JRNPO9BN100", Part Name=0603贴片电容, ID=7, Part Number=101020103-0014, SMD/DIP=SMD
C26 C38 C40: library part 101020103-0003, "105pF,16 V,±10%,0603,国巨,CC0603KRX7R7BB105", Part Name=0603贴片电容, ID=14, Part Number=101020103-0003, SMD/DIP=SMD
C27: library part 101020103-0010, "101pf,50 V,±5%,0603,国巨,CC0603JRNP09BN101", Part Name=0603贴片电容, ID=4, Part Number=101020103-0010, SMD/DIP=SMD
C29: library part 101020103-0028, "5P,50 V,±5%,0603,闵达,5P/50V，±5%，0603", Part Name=0603贴片电容, ID=28, Part Number=101020103-0028, SMD/DIP=SMD
D1 D4: library part 101040101-0055, "DS36W,SOD123-FL,3 A,42 V,60 V,浙江领晨科技有限公司,DS36W", Part Name=贴片肖特基, ID=40, Part Number=101040101-0055, SMD/DIP=SMD
J1: library part 1010902-0125, "PH2.0_2AWR 卧,贴片卧式,母头,单排,2针2.0mm", Part Name=PH座, ID=24, Part Number=1010902-0125, SMD/DIP=SMD
J2: "Header, 5-Pin"
J4: "GH1.25-4PIN,立贴"
J5: library part 90003, "单排插针，4PIN,间距2.54mm", Part Name=单排插针, ID=12, Part Number=90003
J6: library part AD_WXHJ_PinHeader_02, "1*5 ，Φ1.0 ，2.54mm，直脚,无需焊接器件", Part Name=排针, ID=17, Part Number=AD_WXHJ_PinHeader_02, SMD/DIP=DIP
KT1: library part 2, "长度>6，直径9mm", Part Name=按键, ID=2
L1 L2: library part 1010302-0027, "4.7uH,2.9A,±20%,4020,伍尔特电子有限公司,74438356047", Part Name=贴片电感, ID=43, Part Number=1010302-0027, SMD/DIP=SMD
LCD1: library part GVH31158A
MARK1 MARK2: library part AD_WXHJ_MARK_01, "MARK点", ID=8, Part Name=MARK点, Part Number=AD_WXHJ_MARK_01, SMD/DIP=SMD
Q1 Q2: library part 101040201-0001, "9012,PNP,SOT-23,JCET;长电,S9012", Part Name=贴片三极管, ID=16, Part Number=101040201-0001, SMD/DIP=SMD
Q3 Q4 Q5 Q6 Q7 Q9 Q11: library part 101040201-0002, "9013,NPN,SOT-23,长电,S9013", Part Name=贴片三极管, Part Number=101040201-0002, SMD/DIP=SMD
  Q3 Q6 Q7 Q9: ID=14
  Q4 Q5 Q11: ID=15
Q8 Q10 Q12 Q13: library part 101040201-0013, "UT3401ZG,P-MOS,SOT-23,UTC,UT3401ZG", Part Name=功率MOS管, ID=18, Part Number=101040201-0013, SMD/DIP=SMD
R1 R22 R26 R32 R33 R34 R38 R39: library part 101010103-0008, "1K,±5%,1/10W,0603,国巨,RC0603JR-071KL", Part Name=0603贴片电阻, ID=10, Part Number=101010103-0008, SMD/DIP=SMD
R2 R13 R20 R37: library part 101010103-0006, "国巨,±5%,0603,,155 ℃,-55 ℃,RC0603JR-073KL,无铅,100 ppm/℃,1/10W,,3K", Part Name=0603贴片电阻, Part Number=101010103-0006, SMD/DIP=SMD
  R2 R20: ID=22
  R13 R37: ID=23
R3: library part 101010103-0022, "100R,±5%,1/10W,0603,国巨,RC0603JR-07100RL", Part Name=0603贴片电阻, ID=5, Part Number=101010103-0022, SMD/DIP=SMD
R4 R5 R8 R10 R42 R43: library part 101010103-0003, "国巨,±5%,0603,,155 ℃,-55 ℃,RC0603JR-0710KL,无铅,200 ppm/℃,1/10W,,10K", Part Name=0603贴片电阻, ID=7, Part Number=101010103-0003, SMD/DIP=SMD
R6 R11: library part 101010103-0005, "国巨,±5%,0603,,155 ℃,-55 ℃,RC0603JR-07100KL,无铅,100 ppm/℃,1/10W,,100K", Part Name=0603贴片电阻, ID=3, Part Number=101010103-0005, SMD/DIP=SMD
R7: library part 101010103-0066, "330K,±5%,1/10W,0603,国巨,RC0603JR-07330KL", Part Name=0603贴片电阻, ID=30, Part Number=101010103-0066, SMD/DIP=SMD
R9 R47 R50: library part 101010103-0002, "国巨,±5%,0603,,155 ℃,-55 ℃,RC0603JR-071ML,无铅,200 ppm/℃,1/10W,,1M", Part Name=0603贴片电阻, ID=11, Part Number=101010103-0002, SMD/DIP=SMD
R12: library part 101010103-0044, "220K,±5%,1/10W,0603,国巨,RC0603JR-07220KL", Part Name=0603贴片电阻, ID=31, Part Number=101010103-0044, SMD/DIP=SMD
R14 R25 R35: library part 101010103-0025, "国巨,±5%,0603,,155 ℃,-55 ℃,RC0603JR-072ML,含铅,100 ppm/℃,1/10W,,2M", Part Name=0603贴片电阻, ID=20, Part Number=101010103-0025, SMD/DIP=SMD
R15 R27 R36: library part 101010103-0034, "200K,±5%,1/10W,0603,国巨,RC0603JR-07200KL", Part Name=0603贴片电阻, ID=13, Part Number=101010103-0034, SMD/DIP=SMD
R16 R17 R18 R19 R21 R23: library part 101010103-0042, "4.7K±5%,1/10W,0603", Part Name=0603贴片电阻, ID=24, Part Number=101010103-0042, SMD/DIP=SMD
R24 R31: library part 101010103-0006, "3K±5%,1/10W,0603", Part Name=0603贴片电阻, ID=56, Part Number=101010103-0006
R28 R29 R30 R48: library part 101010103-0009, "国巨,±5%,0603,,155 ℃,-55 ℃,RC0603JR-0722RL,无铅,200 ppm/℃,1/10W,,22欧", Part Name=0603贴片电阻, ID=18, Part Number=101010103-0009, SMD/DIP=SMD
R40 R41: library part 101010101-0015, "1R±5%,1/4W,1206", Part Name=1206贴片电阻, ID=115, Part Number=101010101-0015
R44 R45: library part 101010103-0001, "国巨,±5%,0603,,155 ℃,-55 ℃,RC0603J2-070RL,无铅,200 ppm/℃,1/10W,,0R", Part Name=0603贴片电阻, ID=1, Part Number=101010103-0001, SMD/DIP=SMD
R46: library part 101010103-0017, "10R,±5%,1/10W,0603,国巨,RC0603JR-0710RL", Part Name=0603贴片电阻, ID=8, Part Number=101010103-0017, SMD/DIP=SMD
R49: library part 101010103-0040, "国巨,±1%,0603,,155 ℃,-55 ℃,RC0603FR-071ML,无铅,100 ppm/℃,1/10W,,1M", Part Name=0603贴片电阻, ID=36, Part Number=101010103-0040, SMD/DIP=SMD
R51: library part 101010103-0078, "300K,±1%,1/10W,0603,国巨股份有限公司,RC0603FR-07300KL", Part Name=0603贴片电阻, ID=37, Part Number=101010103-0078, SMD/DIP=SMD
SIM1: library part SIMCARD_1
TVS1: library part 101040101-0024, "SMBJ6.0CA,DO-214AA,10.3 V,6.0 V,600 W,58.3 A,800 uA,上海君耀电子有限公司,SMBJ6.0CA", Part Name=TVS管, ID=23, Part Number=101040101-0024, SMD/DIP=SMD
U1 U4: library part 1010503-0023, "SN-SY7072A,SN-SY7072A,SOT23-6,5.5 V,0.85 V,-0.95 V,5 V,2A,5 uA,矽力杰股份有限公司", Part Name=贴片芯片, ID=32, Part Number=1010503-0023, SMD/DIP=SMD
U2: library part 1010503-0029, "CE6232-3.3,CE6232-3.3,SOT89-3,8V,1.8V,0.11V,3.3V,300mA,0.8uA,南京芯力微电子有限公司", Part Name=线性稳压芯片, ID=5, Part Number=1010503-0029, SMD/DIP=SMD
U3: library part 101050101-0218, "P25Q80H-SUH-IR,SOP8208mil,普冉半导体（上海）股份有限公司,P25Q80H-SUH-IR", Part Name=贴片存储芯片FLASH, ID=35, Part Number=101050101-0218, SMD/DIP=SMD
U5: library part 101050101-0261, "1.65V-5.5V,LQFP80,上海复旦微电子集团股份有限公司,FM33LG048", Part Name=MCU处理器, ID=42, Part Number=101050101-0261, SMD/DIP=SMD
U7: library part 1011402-0194, "北高智蓝牙模块DB809", Part Name=蓝牙模块, ID=15, Part Number=1011402-0194, SMD/DIP=SMD
U8: "EC801E Moudle 109PIN 17.7X15.8mm H2.4mm RO", Manufacturer=QUECTEL, Geometry.Height=2.4mm, Part Description="EC801E Moudle 109PIN 17.7X15.8mm H2.4mm RO"
U9: library part 101050101-0060, "DRV8837DSGR,S-PWSON-N8,TI,DRV8837DSGR", Part Name=驱动芯片, ID=23, Part Number=101050101-0060, SMD/DIP=SMD
U10: library part 1011301-0022, "HP303B,4.7mm*3.7mm,惠贻华普,HP303B,含铅", Part Name=HP303B温压传感器, ID=27, Part Number=1011301-0022, SMD/DIP=SMD
W1: library part 1010902-0145, "UB06000058A,3*3.1*1.25mm,公头,单排,IPEX一代板端", Part Name=IPEX座, ID=31, Part Number=1010902-0145, SMD/DIP=SMD
Y1: library part 1010601-0020, "SF32WK32768D71T005,3215,32.768kHz,-0.03 ppm/℃,无源,湖北泰晶电子科技股份有限公司,SF32WK32768D71T005", Part Name=贴片晶振, ID=45, Part Number=1010601-0020, SMD/DIP=SMD

## Free pads (board coordinates)
  round 196.85 hole 137.8: 0(9308.7,5566.93) 0(10711.57,8261.81) 0(12114.45,5566.93)

## Via types
v1: diameter 24, hole 12, Top Layer to Bottom Layer, tented both sides, 368 vias

## Nets (pads, with @x,y where several pads share a name; then routed paths per layer and width w, separated by ;. In a path a pad name is that pad's centre, name@x,y a point inside that pad or via, vN(x,y) a via of type N, cw(c..) or ccw(c..) an arc to the next point about the centre after c; other vN are vias at no path point)
5V: C32.1 C49.1 R49.2 U1.5 U9.1 | length 2000.2
  Top Layer w30: 11385,7924.33 11385,7940
  Bottom Layer w30: 11391,7970 11404,7983 11586,7983 11601,7968 11690.18,7968 11757.68,7900.51 11757.68,7792.51 11870,7680.18 11870,6991 11914,6947 12040,6947 12068,6919 12068,6794 11948,6674 11885,6674 11859,6648
  other v1: 11858,6636 11857,6661 11362,7956 11391,7958
AS_CL: R1.1 U5.69 | length 1995.5
  Top Layer w10: R1.1@11270,8073 11292,8051 v1(11292,8032) ; v1@11324.96,6968 v1(11318.48,6968) 11318.48,6903.52 11368.53,6853.47 U5.69@11556.84,6853.47
  Bottom Layer w10: v1(11292,8032) 11292,7664 11313,7643 11622,7643 11645.68,7619.32 11645.68,7345.89 11535,7235.21 11535,7075 11520.63,7060.63 11413.29,7060.63 11394.16,7041.5 11392.5,7041.5 11379,7028 11367.25,7028 11366.25,7029 11339.75,7029 11318.48,7007.73 v1(11318.48,6968)
AS_OP: R39.1 U5.70 | length 2012.2
  Top Layer w10: R39.1@11270,8131 v1(11324,8131) ; v1(11353,6997) 11353,6915 11394.84,6873.16 U5.70@11556.84,6873.16
  Bottom Layer w10: v1(11324,8131) 11325,8130 11325,7680 11345,7660 11642,7660 11662.68,7639.32 11662.68,7338.84 11552,7228.17 11552,7062 11533.63,7043.63 11420.33,7043.63 11373.7,6997 v1(11353,6997)
BLE_STATUS: R45.1 U5.50 | length 1073.6
  Top Layer w10: R45.1@10996,5791 11153,5791 11322,5960 11322,6506.12 11287.16,6540.97 U5.50@11287.16,6623.16
BLE_WAKEUP: R44.1 U5.51 | length 1118.8
  Top Layer w10: R44.1@10996,5733 11121,5733 11339,5951 11339,6513.17 11306.84,6545.32 U5.51@11306.84,6623.16
CAT.1-RESET: Q6.3 U8.15 | length 896.1
  Top Layer w10: U8.15@9866.46,6904.04 v1(9866.46,6963.46) ; v1(10484.76,7170) Q6.3@10514.76,7200
  Bottom Layer w10: v1(9866.46,6963.46) 9953.46,6963.46 9987,6997 9987,7150 10008,7171 10483.76,7171 v1(10484.76,7170)
CAT.1-RXD: Q5.3 R19.1 U8.17 | length 221.8
  Top Layer w10: U8.17@9779.84,6904.04 9779.84,6956.84 9785,6962 9812,6962 9821,6971 R19.1@9821,7026 9842.76,7026 Q5.3@9874.76,7058
CAT.1-TXD: Q4.2 U8.18 | length 445.3
  Top Layer w10: U8.18@9736.54,6904.04 v1(9736.54,6968.54) ; Q4.2@9883,7156 9916,7156 v1(9918,7154)
  Bottom Layer w10: v1(9736.54,6968.54) 9736.54,7096.54 9758,7118 9902,7118 9918,7134 v1(9918,7154)
CAT.1_KEY: R24.1 U5.20 | length 398.5
  Top Layer w10: R24.1@10731,7098 v1(10769,7098) ; v1(11075,7144) 11108.83,7144 U5.20@11109.99,7142.84
  Bottom Layer w10: v1(10769,7098) 11005,7098 11051,7144 v1(11075,7144)
CAT.1_VCC: C15.1 C16.1 C18.1 C20.1 C22.2 C23.1 Q10.3 R6.2 U4.5 U8.42 U8.43 VGPRS.1 | length 2061.4
  Top Layer w10: 10356,6106 10363,6113 ; 10383,6119 10389,6113 v1(10389,5993) ; VGPRS.1@10469,5182 v1(10469,5236) ; C20.1@10597.51,6246 10622.51,6271 10639.54,6271 10674.54,6306 R6.2@10675,6306
  Top Layer w25: 9818,6128 9823.15,6133.15 U8.42@9823.15,6219 ; U8.43@9866.46,6219 9866.46,6140.54 9868,6139
  Top Layer w40: 10226,6124 10226,6588 10268,6630 10381,6630 10434.93,6683.93 C15.1@10434.93,6774
  Bottom Layer w10: v1(10389,5993) 10389,5800 10469,5720 v1(10469,5236)
CLOSE: U5.71 U9.5 | length 1483.1
  Top Layer w10: v1(11398,6964) 11398,6935 11440.16,6892.84 U5.71@11556.84,6892.84 ; U9.5@11460.4,7852.47 11509.53,7852.47 v1(11520,7842)
  Bottom Layer w10: v1(11398,6964) 11398,6997.25 11427.37,7026.63 11550.63,7026.63 11569,7045 11569,7221.12 11679.68,7331.8 11679.68,7820.32 11658,7842 v1(11520,7842)
COM0: LCD1.1 U5.6 | length 572.5
  Top Layer w10: U5.6@11385.58,7142.84 11385.58,7402.46 11400.12,7417 11469.08,7417 11485.63,7433.54 11598.54,7433.54 11612.02,7447.02 LCD1.1@11612.02,7515
COM1: LCD1.2 U5.7 | length 507.1
  Top Layer w10: U5.7@11365.9,7142.84 11365.9,7406.81 11393.08,7434 11452.04,7434 11468.58,7450.54 11521.54,7450.54 11533.28,7462.28 LCD1.2@11533.28,7515
COM2: LCD1.3 U5.8 | length 451.6
  Top Layer w10: U5.8@11346.21,7142.84 11346.21,7411.17 11386.04,7451 11445,7451 11454.54,7460.54 LCD1.3@11454.54,7515
COM3: LCD1.4 U5.9 | length 392.6
  Top Layer w10: U5.9@11326.53,7142.84 11326.53,7415.53 11375.8,7464.8 LCD1.4@11375.8,7515
EN_GPRS: R9.2 R37.2 U4.4 U5.33 | length 1309.9
  Top Layer w10: R37.2@10521,6302 10522,6303 R9.2@10584,6303 v1(10623,6303) ; v1(10582,6202) 10583,6201 U4.4@10583,6171.8 ; U5.33@11037.16,6833.79 v1(11097,6833.79)
  Bottom Layer w10: v1(10582,6202) 10582,6287 10598,6303 v1(10623,6303) 10623,6799 10657.79,6833.79 v1(11097,6833.79)
EN_VM: R50.2 U1.4 U5.54 | length 867.2
  Top Layer w10: 11391,6691 11365.9,6665.9 U5.54@11365.9,6623.16 11365.9,6558.39 11408,6516.29 R50.2@11408,6516 11450,6474 11450,6432 11465,6417 v1(11479,6417) ; U1.4@11882,6513.4 11884,6515.4 v1(11884,6537)
  Bottom Layer w10: v1(11479,6417) 11651,6417 11672,6438 11868,6438 11884,6454 v1(11884,6537)
FLASH_CLK: U3.6 U5.37 | length 546.5
  Top Layer w10: U5.37@11037.16,6755.05 v1(11099,6755.05) ; v1(11099,6436) 11099,6365 11110,6354 U3.6@11189.09,6354
  Bottom Layer w10: v1(11099,6436) v1(11099,6755.05)
FLASH_CS: U3.1 U5.36 | length 450.9
  Top Layer w10: U3.1@10882,6454 10926,6454 10934,6462 10934,6740 10968.73,6774.73 U5.36@11037.16,6774.73
FLASH_CTL: R2.1 U5.35 | length 537.1
  Top Layer w10: R2.1@10732,6516 10732,6586 10750,6604 10903,6604 10917,6618 10917,6747.04 10964.38,6794.42 U5.35@11037.16,6794.42
FLASH_MISO: U3.2 U5.38 | length 457
  Top Layer w10: U3.2@10882,6404 10936,6404 10951,6419 10951,6700 10986.36,6735.36 U5.38@11037.16,6735.36
FLASH_MOSI: U3.5 U5.39 | length 637.7
  Top Layer w10: U5.39@11037.16,6715.68 10991.68,6715.68 10968,6692 10968,6390 11054,6304 U3.5@11189.09,6304